# Altium PCB PG4D.PcbDoc (part 1 of 3)
Units mm, origin at the board's own origin, x right, y up, seen from the top; angles counter-clockwise.
Board outline 105.86 x 51.8 mm, 4 copper layers (Top Layer, L2 Flex GND, L3 Flex Signals, Bottom Layer), stack 0.361 mm thick; 218 components, 118 nets, 582 pads, 307 vias.
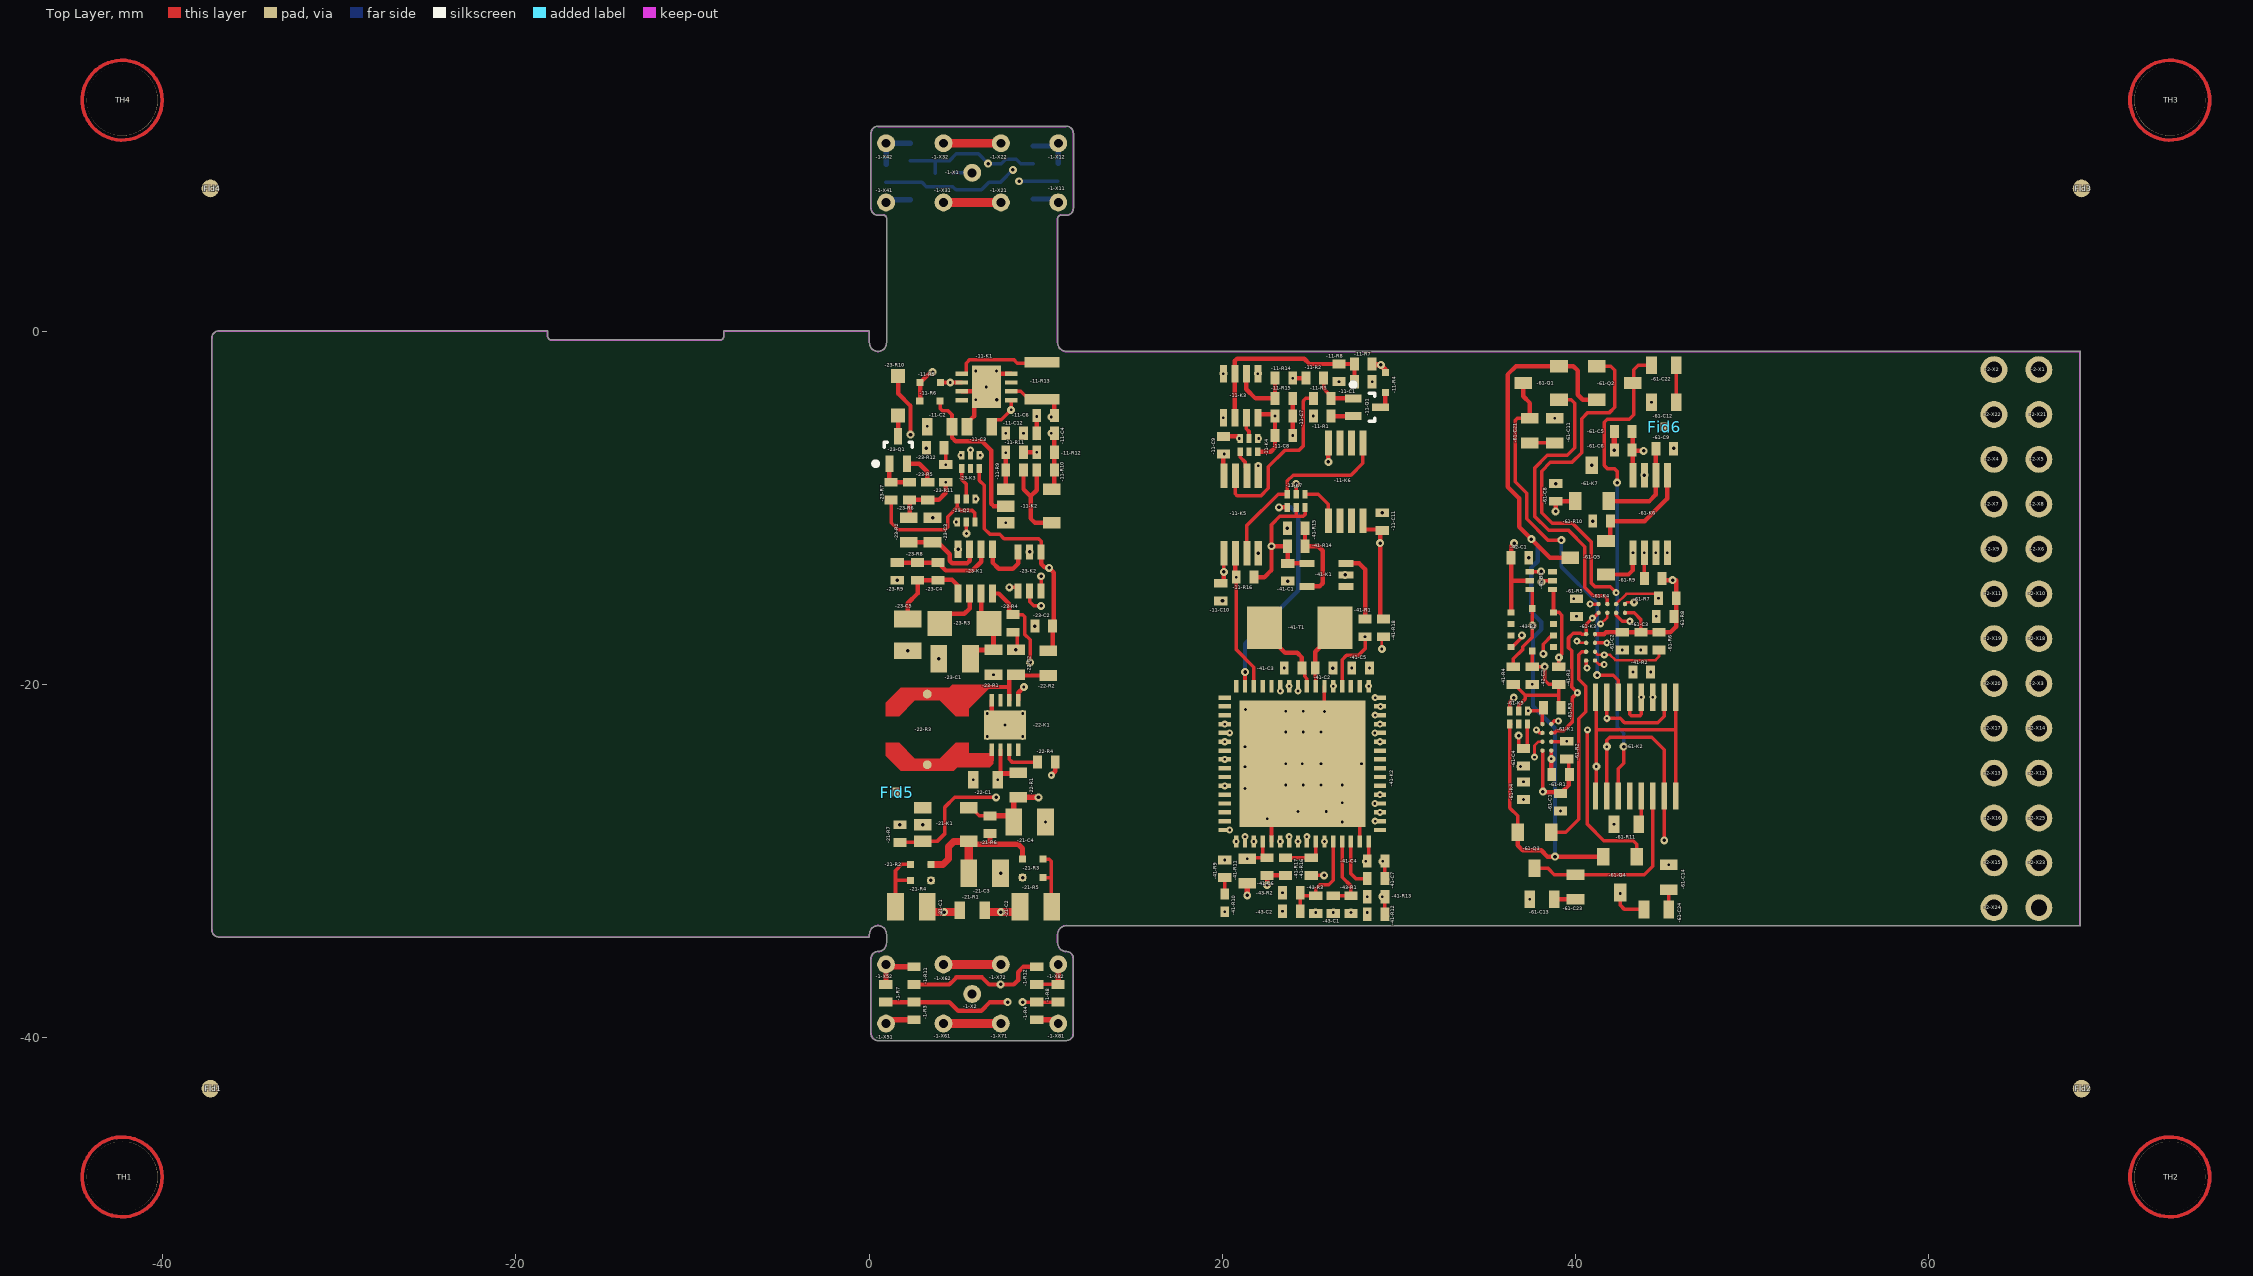
[diagram p0: Top Layer view]
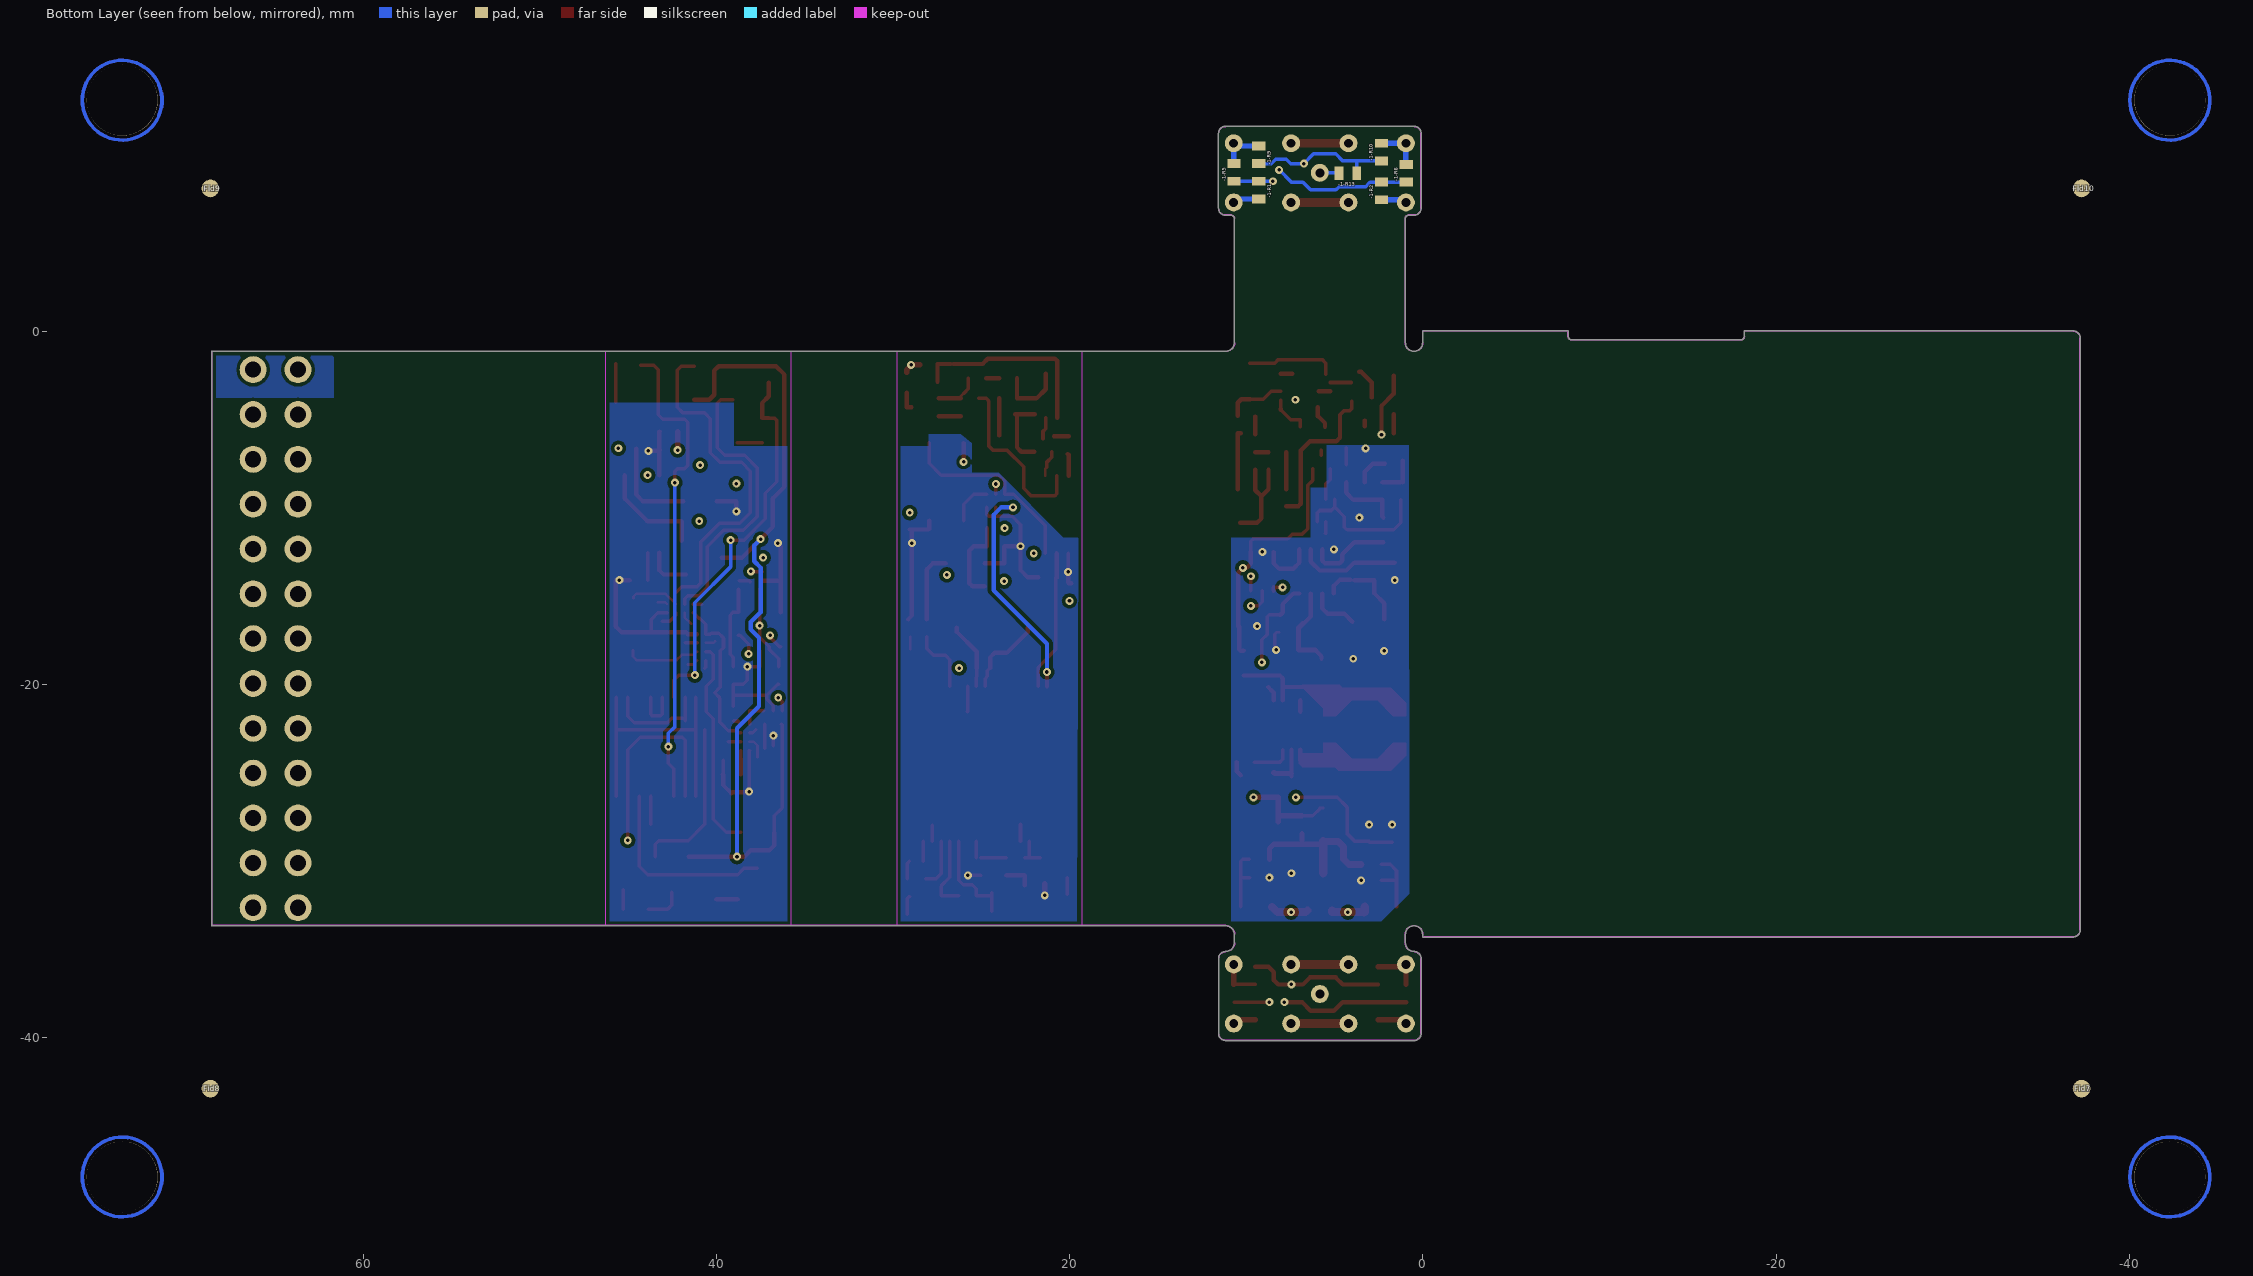
[diagram p1: Bottom Layer view, seen from below]
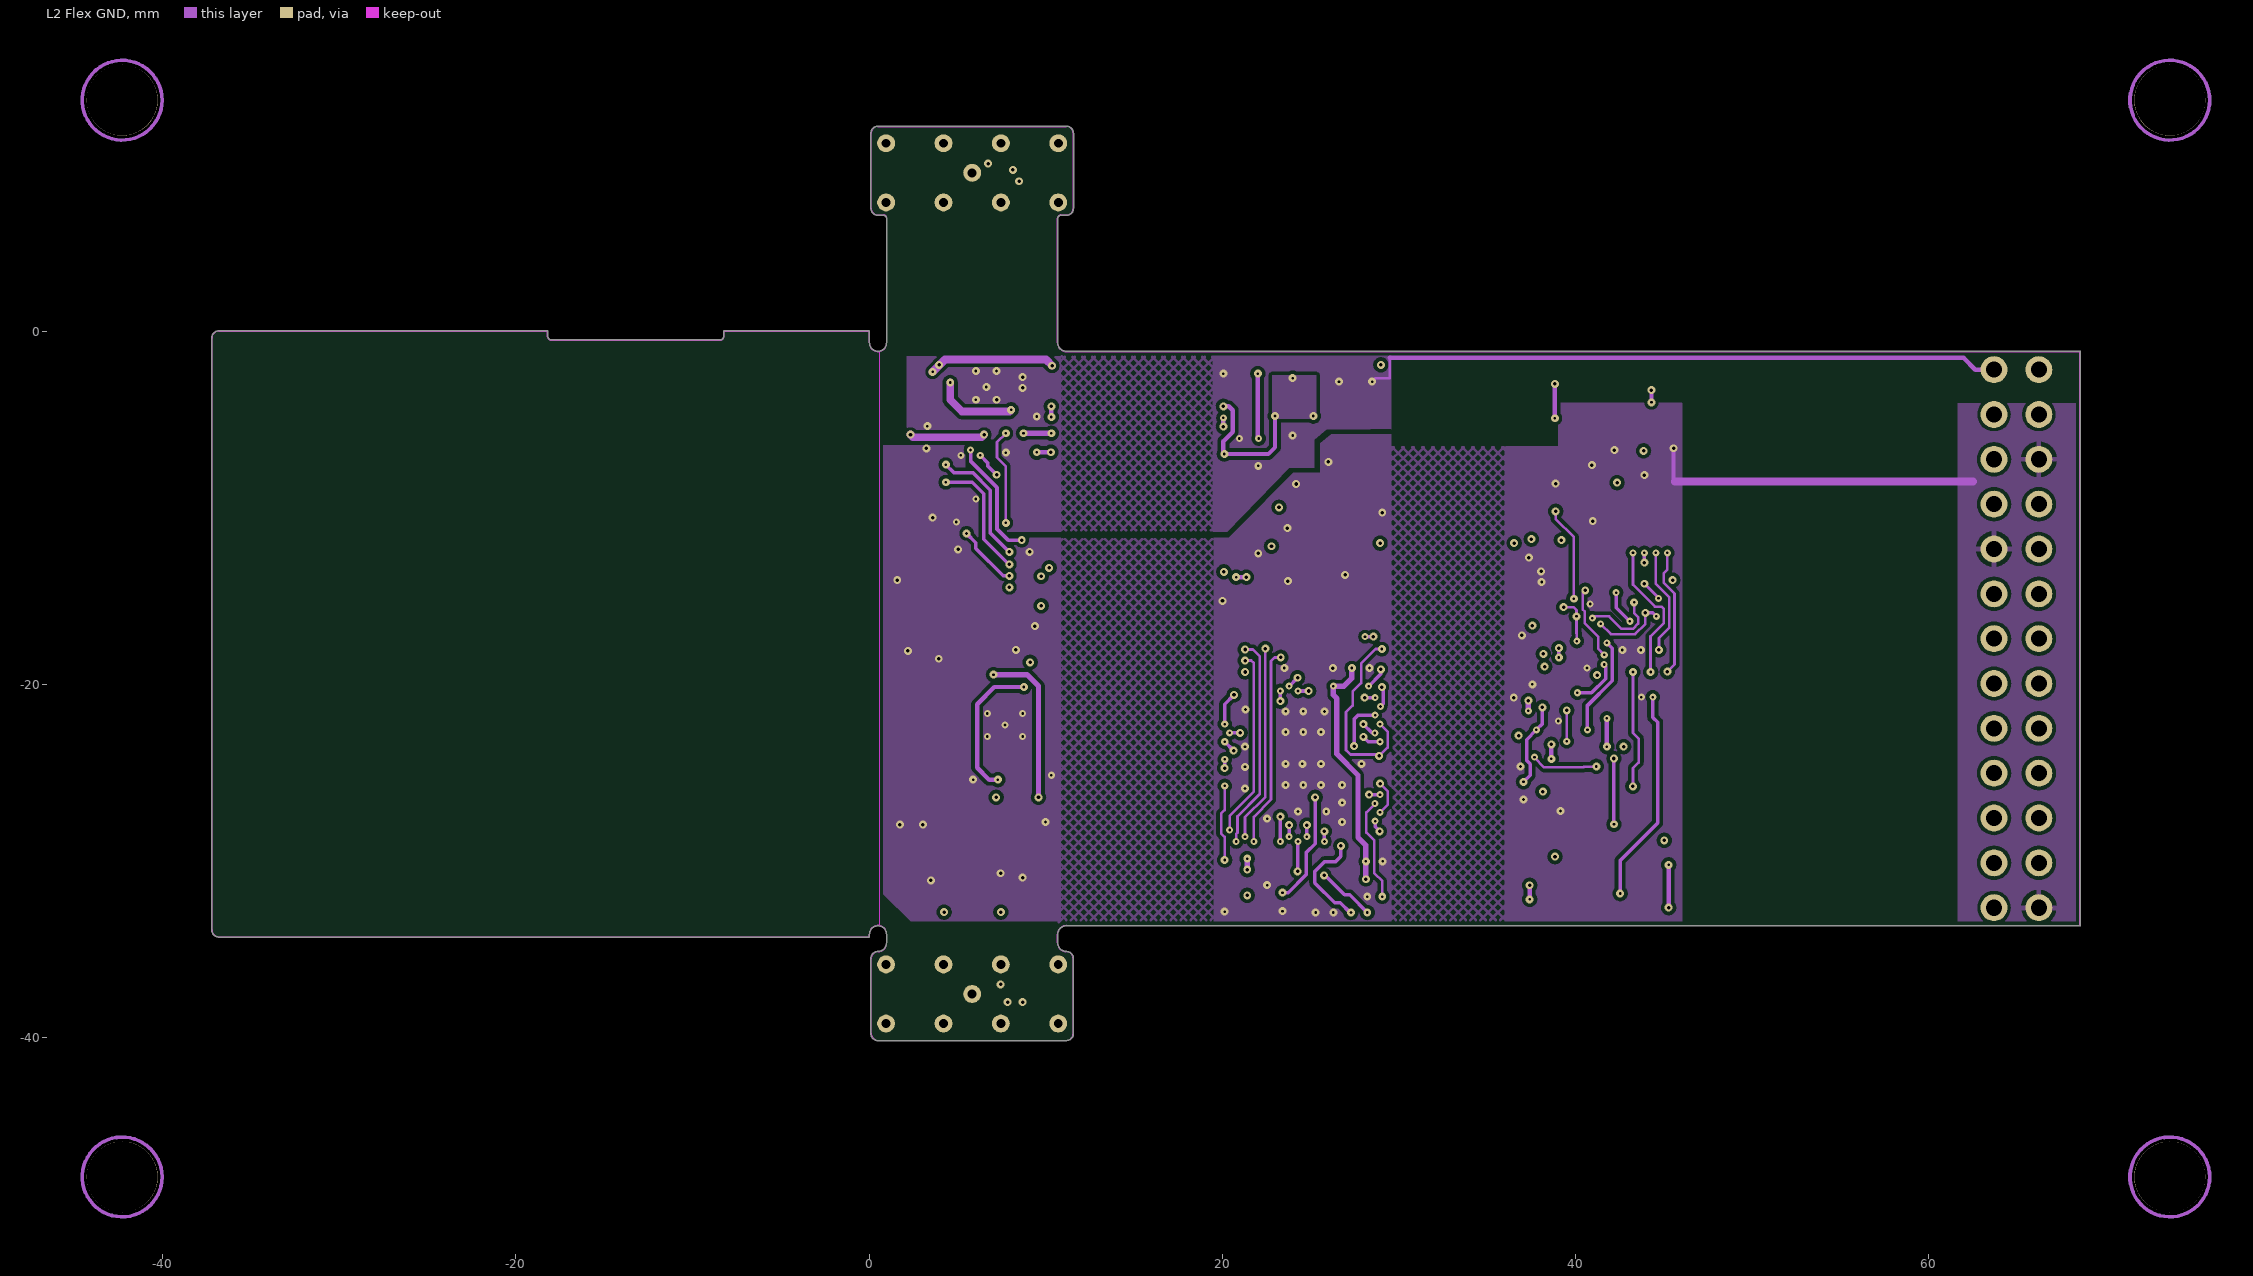
[diagram p2: L2 Flex GND]
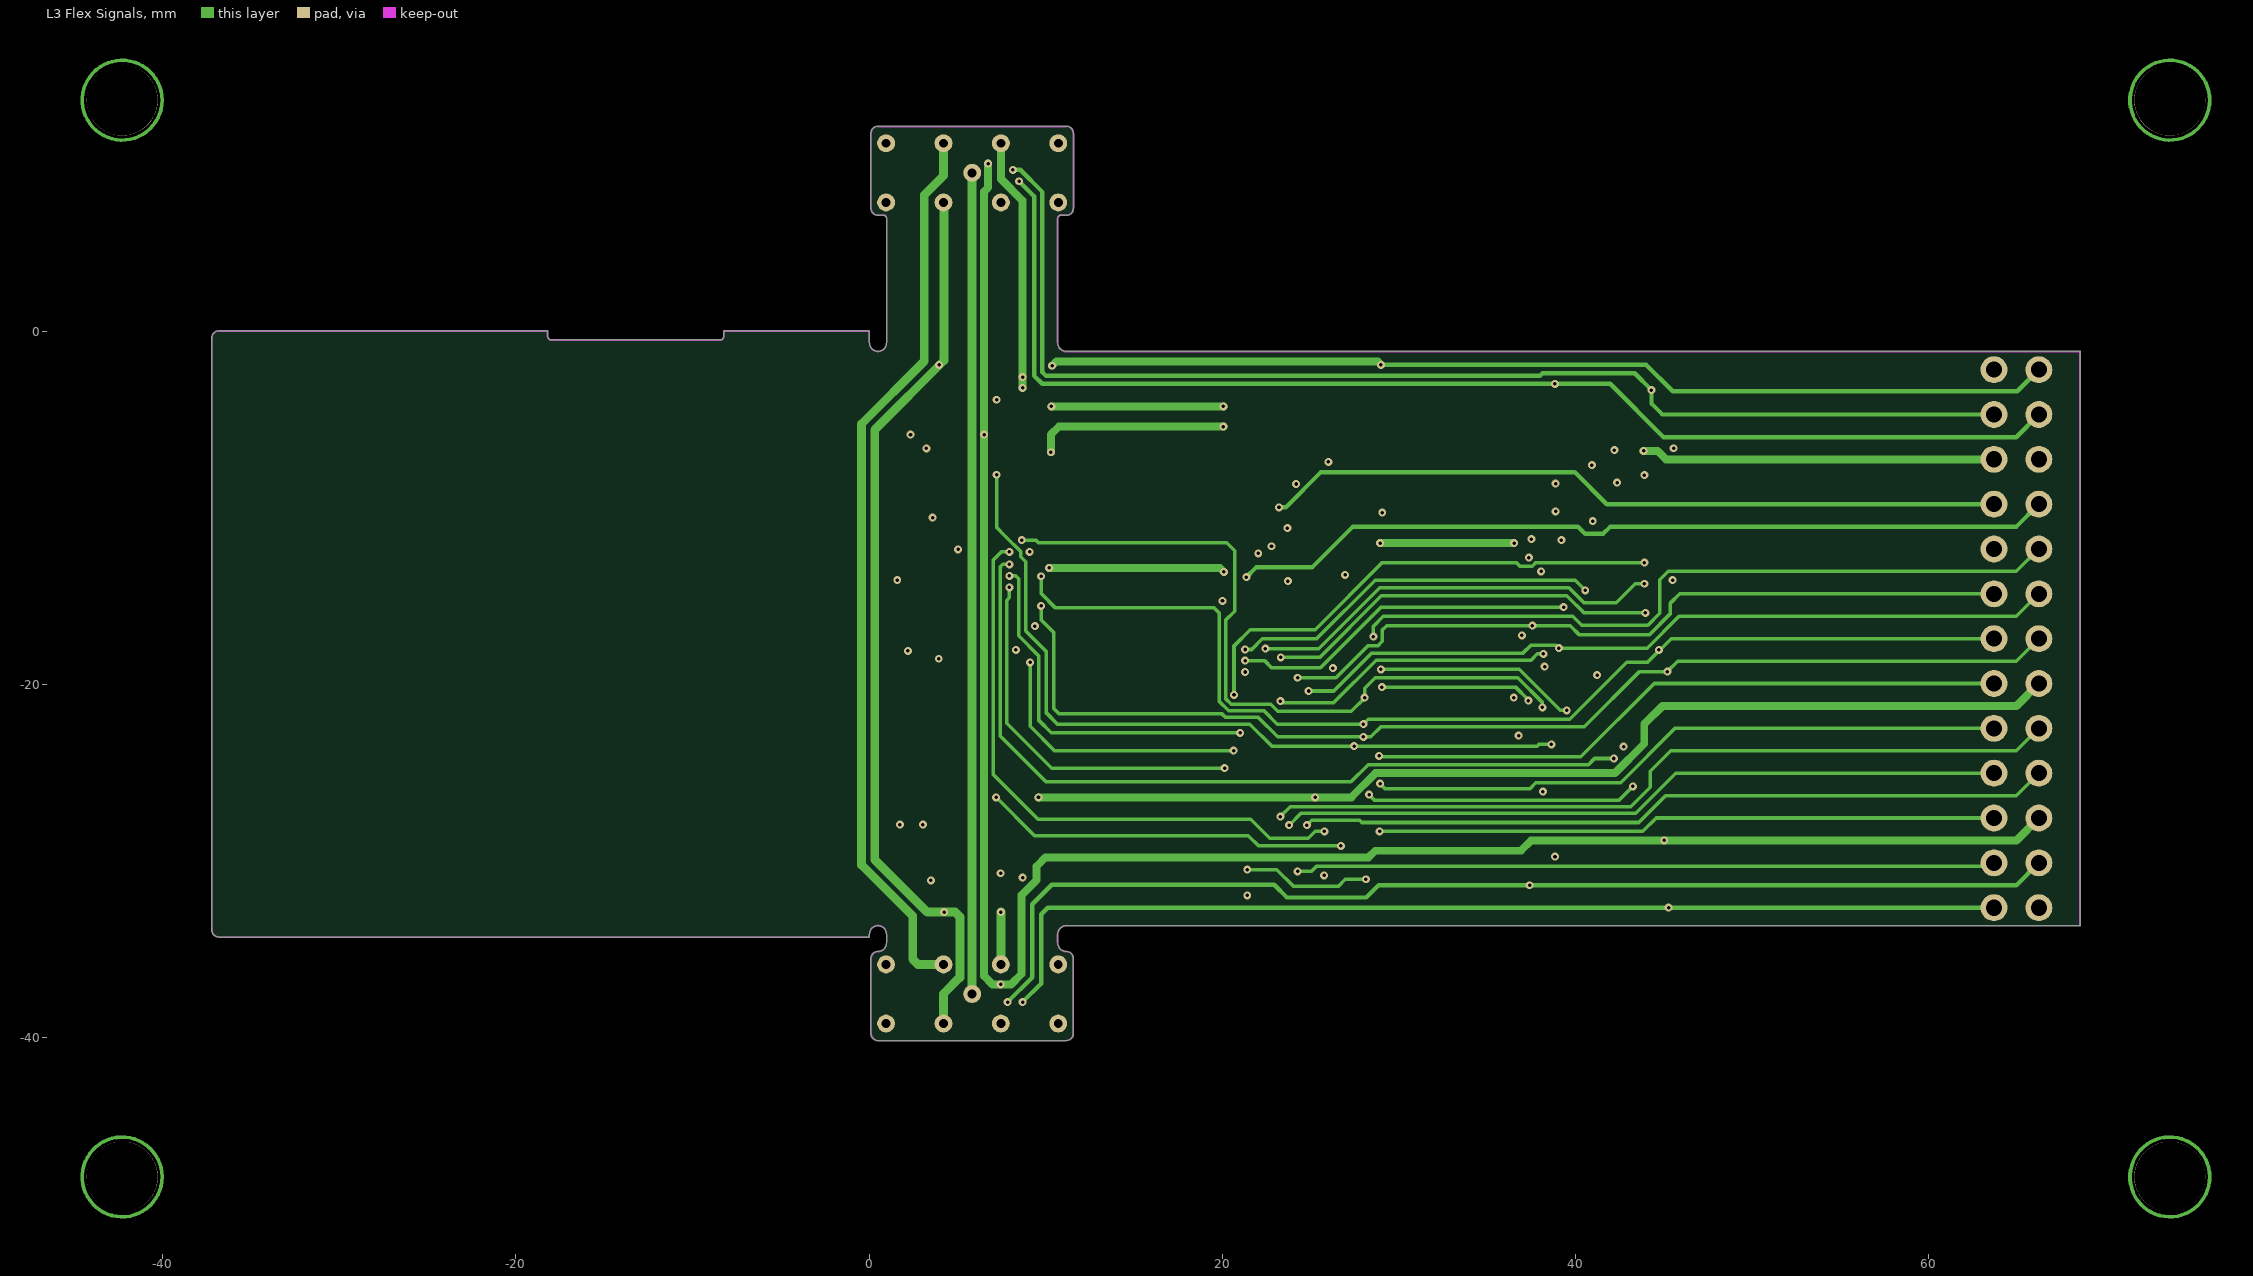
[diagram p3: L3 Flex Signals]
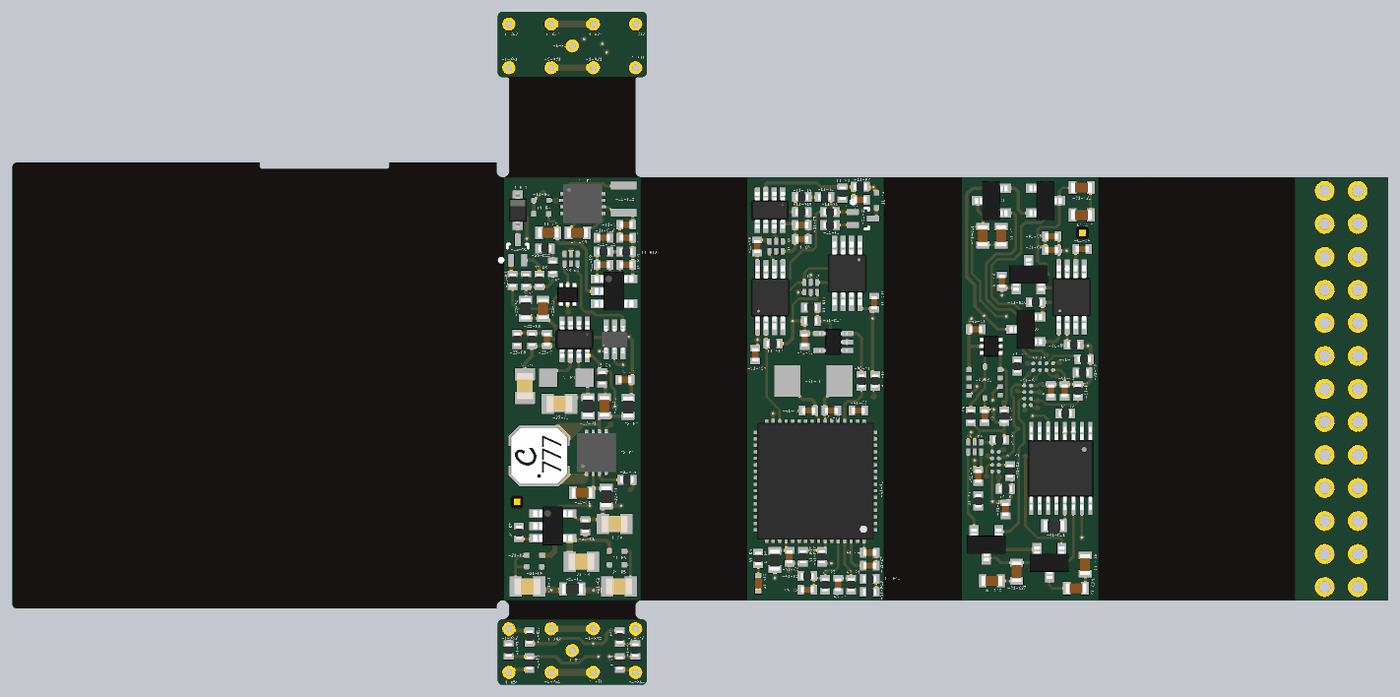
[diagram p6: 3D render of the assembled board from above, using the file's embedded part models]
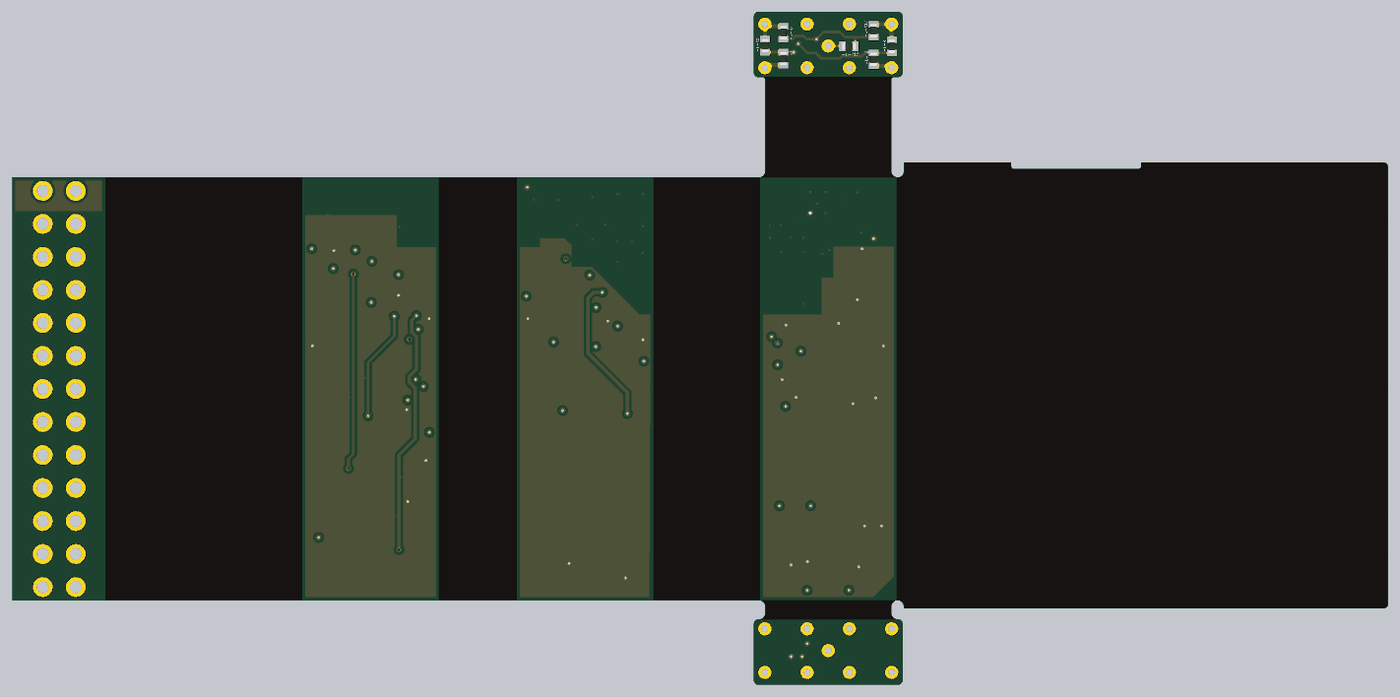
[diagram p7: 3D render of the assembled board from below, using the file's embedded part models]

## Layer stack, top to bottom
Top Solder: solder mask 0.0127, Solder Resist, Dk 3.5
Top Layer: signal copper 0.0533
Dielectric1: prepreg 0.0483, Composite dielectric, Dk 4.48
Dielectric1a: prepreg 0.0483, Composite dielectric, Dk 4.48
L2 Flex GND: signal copper 0.0178
Dielectric2: core 0.0254, AP8515R, Dk 4.8
L3 Flex Signals: signal copper 0.0178
Dielectric3: prepreg 0.0483, Composite dielectric, Dk 4.48
Dielectric3a: prepreg 0.0483, Composite dielectric, Dk 4.48
Bottom Layer: signal copper 0.0533
Bottom Solder: solder mask 0.0127, Solder Resist, Dk 3.5

## Board outline
-36.834,-34.315 0,-34.315 ccw(c0,-34.29) 0.025,-34.29 0.025,-34.163 cw(c0.508,-34.163) 0.991,-34.163 0.991,-34.647 cw(c0.508,-34.647) 0.508,-35.13 ccw(c0.508,-35.536) 0.102,-35.536 0.102,-39.774 ccw(c0.508,-39.774) 0.508,-40.18 11.176,-40.18 ccw(c11.176,-39.774) 11.582,-39.774 ccw(c11.557,-39.774) 11.582,-39.774 11.582,-35.536 ccw(c11.557,-35.536) 11.582,-35.536 cw(c11.176,-35.536) 11.582,-35.536 ccw(c11.176,-35.536) 11.176,-35.13 cw(c11.176,-34.647) 10.693,-34.647 10.693,-34.163 cw(c11.176,-34.163) 11.176,-33.68 68.596,-33.68 ccw(c68.596,-33.655) 68.622,-33.655 68.622,-1.155 ccw(c68.596,-1.155) 68.596,-1.13 11.176,-1.13 cw(c11.176,-0.647) 10.693,-0.656 ccw(c10.67,-0.647) 10.695,-0.647 10.695,6.395 cw(c10.87,6.395) 10.858,6.569 11.179,6.569 ccw(c11.179,6.975) 11.585,6.975 11.585,11.214 ccw(c11.178,11.214) 11.181,11.62 ccw(c11.178,11.214) 11.181,11.62 ccw(c11.176,11.595) 11.18,11.62 ccw(c11.176,11.595) 11.176,11.62 0.508,11.62 ccw(c0.508,11.214) 0.102,11.214 0.102,6.975 ccw(c0.127,6.975) 0.104,6.964 ccw(c0.509,6.975) 0.509,6.569 0.83,6.569 cw(c0.818,6.395) 0.992,6.395 cw(c0.818,6.395) 0.992,6.395 0.991,-0.647 ccw(c1.016,-0.647) 0.991,-0.647 cw(c0.508,-0.647) 0.991,-0.647 cw(c0.508,-0.647) 0.991,-0.647 cw(c0.508,-0.647) 0.025,-0.647 0.025,0 ccw(c0,0) 0,0.025 -8.215,0.025 ccw(c-8.215,0) -8.241,0 -8.241,-0.3 cw(c-8.415,-0.3) -8.415,-0.475 -18.015,-0.475 cw(c-18.015,-0.3) -18.19,-0.3 -18.19,0 ccw(c-18.215,0) -18.215,0.025 -36.834,0.025 ccw(c-36.834,-0.381) -37.241,-0.381 -37.241,-33.909 ccw(c-36.834,-33.909)
board region "Layer Stack Region 1": 0.588,-33.687 0.508,-33.671 0.32,-33.708 0.16,-33.815 0.053,-33.975 0.016,-34.163 0.025,-34.29 0.027,-34.29 0.019,-34.309 0,-34.318 -36.834,-34.315 -36.834,-34.323 -36.993,-34.292 -37.127,-34.202 -37.217,-34.068 -37.249,-33.909 -37.241,-0.381 -37.249,-0.381 -37.217,-0.222 -37.127,-0.088 -36.993,0.002 -36.834,0.033 -18.215,0.025 -18.215,0.027 -18.196,0.019 -18.188,0 -18.19,-0.3 -18.193,-0.3 -18.18,-0.368 -18.141,-0.426 -18.083,-0.464 -18.015,-0.478 -8.415,-0.475 -8.415,-0.478 -8.347,-0.464 -8.289,-0.426 -8.251,-0.368 -8.237,-0.3 -8.241,0 -8.243,0 -8.235,0.019 -8.215,0.027 0,0.025 0,0.027 0.019,0.019 0.027,0 0.025,-0.647 0.016,-0.647 0.053,-0.835 0.16,-0.995 0.32,-1.102 0.508,-1.139 0.594,-1.122
board region "Layer Stack Region 1": 10.851,6.569 10.802,6.559 10.744,6.521 10.705,6.463 10.692,6.395 10.695,-0.647 10.697,-0.647 10.693,-0.656 10.686,-0.656 10.721,-0.835 10.828,-0.995 10.988,-1.102 11.082,-1.12 11.082,-1.13 0.594,-1.122 0.696,-1.102 0.856,-0.995 0.963,-0.835 1,-0.647 0.989,-0.647 1,-0.647 0.989,-0.647 0.992,6.395 0.996,6.395 0.982,6.463 0.944,6.521 0.895,6.553
board region "Layer Stack Region 1": 11.082,-1.13 11.082,-1.12 11.128,-1.13
board region "Layer Stack Region 1": 0.589,-33.687 0.588,-33.687 0.594,-1.122 11.082,-1.13 11.1,-33.686 11.044,-33.697
board region "Layer Stack Region 1": 19.405,-33.681 11.176,-33.68 11.176,-33.671 11.1,-33.686 11.082,-1.13 11.128,-1.13 11.176,-1.139 19.277,-1.138
board region "Layer Stack Region 1": 0.895,6.553 0.886,6.559 0.83,6.571 0.509,6.569 0.509,6.561 0.351,6.593 0.217,6.682 0.127,6.816 0.098,6.964 0.104,6.964 0.1,6.975 0.102,11.214 0.094,11.214 0.125,11.373 0.215,11.507 0.349,11.597 0.508,11.628 11.176,11.62 11.176,11.622 11.181,11.621 11.181,11.628 11.337,11.596 11.471,11.507 11.561,11.372 11.593,11.214 11.585,6.975 11.593,6.975 11.561,6.816 11.472,6.682 11.337,6.593 11.179,6.561 10.858,6.569 10.858,6.571 10.85,6.569
board region "Layer Stack Region 1": 0.594,-35.122 0.696,-35.102 0.856,-34.995 0.963,-34.835 1,-34.647 0.991,-34.163 1,-34.163 0.963,-33.975 0.856,-33.815 0.696,-33.708 0.589,-33.687 11.044,-33.697 10.988,-33.708 10.828,-33.815 10.721,-33.975 10.684,-34.163 10.693,-34.647 10.684,-34.647 10.721,-34.835 10.828,-34.995 10.988,-35.102 11.082,-35.12
board region "Layer Stack Region 1": 11.082,-35.12 11.176,-35.139 11.176,-35.122 11.335,-35.153 11.469,-35.243 11.559,-35.377 11.59,-35.536 11.582,-35.536 11.59,-35.536 11.584,-35.536 11.582,-39.774 11.584,-39.774 11.59,-39.774 11.559,-39.933 11.469,-40.067 11.335,-40.157 11.176,-40.188 0.508,-40.18 0.508,-40.188 0.349,-40.157 0.215,-40.067 0.125,-39.933 0.094,-39.774 0.102,-35.536 0.094,-35.536 0.125,-35.377 0.215,-35.243 0.349,-35.153 0.508,-35.122 0.508,-35.139 0.594,-35.122
board region "Layer Stack Region 1": 29.798,-33.681 19.405,-33.681 19.277,-1.138 29.9,-1.136
board region "Layer Stack Region 1": 35.794,-33.681 29.798,-33.681 29.9,-1.136 35.794,-1.135
board region "Layer Stack Region 1": 46.294,-33.682 35.794,-33.681 35.794,-1.135 46.4,-1.133
board region "Layer Stack Region 1": 61.507,-33.682 46.294,-33.682 46.4,-1.133 61.499,-1.131
board region "Layer Stack Region 1": 61.499,-1.131 68.596,-1.13 68.596,-1.128 68.616,-1.136 68.624,-1.155 68.622,-33.655 68.624,-33.655 68.616,-33.674 68.596,-33.683 61.507,-33.682

## Design rules (kind name [scope] priority, off if disabled: settings)
Clearance FEEDHOLE_20MIL [HasFootprint('FEEDHOLE_20MIL') vs IsKeepout] p1: gap=0.18
Clearance Polygon [InPolygon] p2: gap=0.2
Clearance "Pad to Pad" [IsPad vs IsPad] p3: gap=0.2
Clearance Clearance_keepout [IsKeepout] p4: gap=0.2
Clearance [All] p5: gap=0.152
ComponentClearance [All vs All and Not HasFootprint('HDR_HOLE_RING')] p1: gap=0.25 collisioncheckmode=3 verticalgap=0.25 showdistances=TRUE
HoleToHoleClearance [All] p1: gap=0.2 allowstackedmicrovias=TRUE
MinimumSolderMaskSliver FEEDHOLE_20MIL_Solder [HasFootprint('FEEDHOLE_20MIL') vs IsArc or IsTrack or IsRegion] p1: minsoldermaskwidth=0.05
MinimumSolderMaskSliver [All vs All and NOT HasFootprint('DFN8') AND NOT HasFootprint('uSOP-8L') AND NOT HasFootprint('uPak6') AND NOT HasFootprint('SOT-563') AND NOT HasFootprint('QFN64')] p2: minsoldermaskwidth=0.1
PasteMaskExpansion DNP [InComponentClass('DNP')] p1: expansion=-2
PasteMaskExpansion [All] p2: expansion=0
PolygonConnect IsVia [IsVia] p1: connectstyle=Direct reliefconductorwidth=0.254 reliefentries=4 polygonreliefangle="90 Angle" airgapwidth=0.254
PolygonConnect [All] p2: connectstyle=Relief reliefconductorwidth=0.3 reliefentries=4 polygonreliefangle="90 Angle" airgapwidth=0.25
RoutingVias L1-L4 [All] p1: holewidth=0.2 width=0.45 viastyle="Through Hole" minholewidth=0.15 minwidth=0.4 maxholewidth=0.2 maxwidth=0.45
SilkToSolderMaskClearance SilkscreenOverComponentPads [IsPad] p1: minsilkscreentomaskgap=0.254 clearancetoexposedcopper=TRUE
SolderMaskExpansion [All] p1: expansion=0.05
Width [All] p1: maxlimit=1 minlimit=0.15 preferedwidth=0.25 checkconnectedcopper=TRUE
24 further rules are at their usual default settings.

## Classes and differential pairs
component class DNP: -1-R9 -1-R10 -1-R11 -1-R12 -23-R11 -23-R12 -41-R15

## Components (designator, comment, footprint, x,y, rotation, side; value= is the part's Value field where it differs from the comment)
-1-R1 "R_0_0402" RES_0402 9.3,8 r90 bottom
-1-R2 "R_0_0402" RES_0402 2.35,7.95 r90 bottom
-1-R3 "R_0_0402" RES_0402 2.55,-38.5 r90 top
-1-R4 "R_0_0402" RES_0402 9.5,-38.5 r90 top
-1-R5 "R_0_0402" RES_0402 10.7,9 r270 bottom
-1-R6 "R_0_0402" RES_0402 0.95,8.95 r270 bottom
-1-R7 "R_0_0402" RES_0402 0.95,-37.5 r270 top
-1-R8 "R_0_0402" RES_0402 10.7,-37.5 r270 top
-1-R9 "R_DNP_0402" RES_0402 9.3,10 r270 bottom
-1-R10 "R_DNP_0402" RES_0402 2.35,10.15 r270 bottom
-1-R11 "R_DNP_0402" RES_0402 2.55,-36.5 r270 top
-1-R12 "R_DNP_0402" RES_0402 9.5,-36.5 r90 top
-1-R13 "R_0_0402" RES_0402 4.25,8.95 r180 bottom
-1-X1 "HOLE_20m" FEEDHOLE_20MIL 5.844,8.979 r270 top
-1-X2 "HOLE_20m" FEEDHOLE_20MIL 5.842,-37.539 r270 top
-1-X11 "HOLE_20m" FEEDHOLE_20MIL 10.721,7.302 r270 top
-1-X12 "HOLE_20m" FEEDHOLE_20MIL 10.721,10.655 r270 top
-1-X21 "HOLE_20m" FEEDHOLE_20MIL 7.47,7.302 r270 top
-1-X22 "HOLE_20m" FEEDHOLE_20MIL 7.47,10.655 r270 top
-1-X31 "HOLE_20m" FEEDHOLE_20MIL 4.219,7.302 r270 top
-1-X32 "HOLE_20m" FEEDHOLE_20MIL 4.219,10.655 r270 top
-1-X41 "HOLE_20m" FEEDHOLE_20MIL 0.967,7.302 r270 top
-1-X42 "HOLE_20m" FEEDHOLE_20MIL 0.967,10.655 r270 top
-1-X51 "HOLE_20m" FEEDHOLE_20MIL 0.965,-39.215 r270 top
-1-X52 "HOLE_20m" FEEDHOLE_20MIL 0.965,-35.862 r270 top
-1-X61 "HOLE_20m" FEEDHOLE_20MIL 4.216,-39.215 r270 top
-1-X62 "HOLE_20m" FEEDHOLE_20MIL 4.216,-35.862 r270 top
-1-X71 "HOLE_20m" FEEDHOLE_20MIL 7.468,-39.215 r270 top
-1-X72 "HOLE_20m" FEEDHOLE_20MIL 7.468,-35.862 r270 top
-1-X81 "HOLE_20m" FEEDHOLE_20MIL 10.719,-39.215 r270 top locked
-1-X82 "HOLE_20m" FEEDHOLE_20MIL 10.719,-35.862 r270 top locked
-2-X1 "0.1\" header hole" HDR_HOLE_RING 66.27,-2.171 r270 top
-2-X2 "0.1\" header hole" HDR_HOLE_RING 63.73,-2.171 r270 top
-2-X3 "0.1\" header hole" HDR_HOLE_RING 66.27,-19.951 r270 top
-2-X4 "0.1\" header hole" HDR_HOLE_RING 63.73,-7.251 r270 top
-2-X5 "0.1\" header hole" HDR_HOLE_RING 66.27,-7.251 r270 top
-2-X6 "0.1\" header hole" HDR_HOLE_RING 66.27,-12.331 r270 top
-2-X7 "0.1\" header hole" HDR_HOLE_RING 63.73,-9.791 r270 top
-2-X8 "0.1\" header hole" HDR_HOLE_RING 66.27,-9.791 r270 top
-2-X9 "0.1\" header hole" HDR_HOLE_RING 63.73,-12.331 r270 top
-2-X10 "0.1\" header hole" HDR_HOLE_RING 66.27,-14.871 r270 top
-2-X11 "0.1\" header hole" HDR_HOLE_RING 63.73,-14.871 r270 top
-2-X12 "0.1\" header hole" HDR_HOLE_RING 66.27,-25.031 r270 top
-2-X13 "0.1\" header hole" HDR_HOLE_RING 63.73,-25.031 r270 top
-2-X14 "0.1\" header hole" HDR_HOLE_RING 66.27,-22.491 r270 top
-2-X15 "0.1\" header hole" HDR_HOLE_RING 63.73,-30.111 r270 top
-2-X16 "0.1\" header hole" HDR_HOLE_RING 63.73,-27.571 r270 top
-2-X17 "0.1\" header hole" HDR_HOLE_RING 63.73,-22.491 r270 top
-2-X18 "0.1\" header hole" HDR_HOLE_RING 66.27,-17.411 r270 top
-2-X19 "0.1\" header hole" HDR_HOLE_RING 63.73,-17.411 r270 top
-2-X20 "0.1\" header hole" HDR_HOLE_RING 63.73,-19.951 r270 top
-2-X21 "0.1\" header hole" HDR_HOLE_RING 66.27,-4.711 r270 top
-2-X22 "0.1\" header hole" HDR_HOLE_RING 63.73,-4.711 r270 top
-2-X23 "0.1\" header hole" HDR_HOLE_RING 66.27,-30.111 r270 top
-2-X24 "0.1\" header hole" HDR_HOLE_RING 63.73,-32.651 r270 top
-2-X25 "0.1\" header hole" HDR_HOLE_RING 66.27,-27.571 r270 top
-11-C1 "C_68p_C0G_50_0402_5%" CAP_0402 28,-2.85 r0 top
-11-C2 "C_1u_X5R_50_0603_10%" CAP_0603 4,-5.4 r180 top
-11-C3 "C_1u_X5R_50_0603_10%" CAP_0603 6.25,-5.4 r180 top
-11-C4 "C_4u7_X5R_6V3_0402_20%" CAP_0402 10,-5.775 r180 top
-11-C6 "C_4u7_X5R_6V3_0402_20%" CAP_0402 10,-4.775 r180 top
-11-C7 "C_100n_X7R_16_0402_10%" CAP_0402 23.5,-4.8 r0 top
-11-C8 "C_100n_X7R_16_0402_10%" CAP_0402 23.5,-5.9 r0 top
-11-C9 "C_100n_X7R_16_0402_10%" CAP_0402 20.075,-6.45 r90 top
-11-C10 "C_100n_X7R_16_0402_10%" CAP_0402 19.925,-14.775 r270 top
-11-C11 "C_100n_X7R_16_0402_10%" CAP_0402 29.075,-10.775 r90 top
-11-C12 "C_10n_X7R_50_0402_20%" CAP_0402 8.25,-5.775 r0 top
-11-K1 "BUCK 4.5-45V DFN8" DFN8 6.65,-3.15 r0 top
-11-K2 "LDO -1.2-20V -200mA" SOT23-5 9.05,-9.9 r0 top
-11-K3 "CMP 2.7-5.5V 40ns SOT23-8" SOT23-8 21.05,-3.65 r270 top
-11-K4 "XOR 1.65-5.5V uPAK6" uPak6 21.525,-6.45 r270 top
-11-K5 "ISO DIG 3-5.5V uSOP8" uSOP-8L 21.075,-10.375 r90 top locked
-11-K6 "Silicon delay 3-3.6V uSOP8" uSOP-8L 27,-8.525 r270 top
-11-K7 "FLIPFLOP 1.65-5.5V uPAk6" uPak6 24.2,-9.6 r270 top
-11-Q1 "Q_-50_-100m_SOT523" SOT523 28.2,-4.3 r0 top
-11-R1 "R_1k_0402" RES_0402 25.675,-4.8 r0 top
-11-R2 "R_5k1_0402" RES_0402 25.25,-2.65 r0 top
-11-R3 "R_5k1_0402" RES_0402 25.675,-3.8 r180 top
-11-R4 "D_30_100m" SSSMini2-F4-B 29.25,-2.9 r270 top
-11-R5 "D_30_100m" SSSMini2-F4-B 3.475,-2.9 r180 top
-11-R6 "D_30_100m" SSSMini2-F4-B 3.45,-3.95 r0 top
-11-R7 "R_49k9_0402" RES_0402 28,-1.85 r180 top
-11-R8 "R_1k_0402" RES_0402 26.625,-2.35 r270 top
-11-R9 "R_49k9_0402" CAP_0402 8.25,-7.85 r0 top
-11-R10 "R_84k5_0402" CAP_0402 10,-7.85 r0 top
-11-R11 "R_1k_0402" RES_0402 8.25,-6.85 r0 top
-11-R12 "R_49k9_0402" RES_0402 10,-6.85 r0 top
-11-R13 "L_470u_35m_10%" IND_1007 9.8,-2.8 r270 top
-11-R14 "R_49k9_0402" RES_0402 23.5,-2.65 r180 top
-11-R15 "R_1k_0402" RES_0402 23.5,-3.8 r0 top
-11-R16 "R_49k9_0402" RES_0402 21.3,-13.925 r180 top
-21-C1 "C_100n_X7R_100_0805_10%" CAP_0805 2.4,-32.6 r180 top
-21-C2 "C_100n_X7R_100_0805_10%" CAP_0805 9.45,-32.6 r0 top
-21-C3 "C_47u_X5R_10_0805_20%" CAP_0805 6.55,-30.7 r0 top
-21-C4 "C_47u_X5R_10_0805_20%" CAP_0805 9.1,-27.8 r0 top
-21-K1 "CUR 2.5-20V SOT23-5" SOT23-5 4.35,-27.95 r0 top
-21-R1 "MOV 12V 0603" RES_0603 5.85,-32.8 r0 top
-21-R2 "D_30_100m" SSSMini2-F4-B 2.925,-30.2 r180 top
-21-R3 "D_30_100m" SSSMini2-F4-B 9.275,-29.9 r0 top
-21-R4 "D_30_100m" SSSMini2-F4-B 2.925,-31.1 r0 top
-21-R5 "D_30_100m" SSSMini2-F4-B 9.275,-30.95 r180 top
-21-R6 "R_100m_0402" RES_0402 6.85,-27.95 r90 top
-21-R7 "R_49k9_0402" RES_0402 1.75,-28.45 r90 top
-22-C1 "C_1u_X5R_50_0603_10%" CAP_0603 6.6,-25.4 r180 top
-22-C2 "C_10u_X5R_6V3_0603_20%" CAP_0603 8.325,-18.75 r90 top
-22-K1 "BUCK 4.5-45V DFN8" DFN8 7.7,-22.3 r90 top locked
-22-R1 "R_0_0603" RES_0603 8.45,-25.7 r90 top
-22-R2 "R_0_0603" RES_0603 10.15,-18.8 r90 top
-22-R3 "L_100u_270m_20%" IND-LPS4414 3.3,-22.55 r90 top
-22-R4 "R_470k_0402" RES_0402 10.05,-24.4 r0 top
-23-C1 "C_47u_X5R_10_0805_20%" CAP_0805 4.85,-18.55 r180 top
-23-C2 "C_100n_X7R_16_0402_10%" CAP_0402 9.9,-16.7 r180 top
-23-C3 "C_1u_X5R_50_0603_10%" CAP_0603 3.6,-11.25 r90 top
-23-C4 "C_10p_C0G_50_0402_5%" CAP_0402 3.9,-13.6 r90 top
-23-C5 "C_330n_X7R_50_0805_10%" CAP_0805 2.2,-17.2 r270 top
-23-K1 "BOOST 2.3-10V TSOT23-8" SOT23-8 6.025,-13.6 r270 top
-23-K2 "DAC REF 2V5" SC70-6 9.1,-13.6 r90 top
-23-K3 "NOR 1.65-5.5V uPak6" uPak6 5.75,-7.4 r270 top
-23-Q1 "Q_-50_-100m_SOT523" SOT523 1.65,-6.725 r90 top
-23-Q2 "M_60_500m_SOT563" SOT-563 5.5,-10.15 r270 top
-23-R1 "R_0_0603" RES_0603 7.05,-18.75 r90 top
-23-R2 "R_0_0603" RES_0603 2.25,-11.25 r90 top
-23-R3 "L_33u_120m_2520_10%" IND_1008 5.4,-16.55 r180 top
-23-R4 "R_15k_0402" RES_0402 8.15,-16.55 r270 top
-23-R5 "R_10_0402" RES_0402 3.325,-9.05 r90 top
-23-R6 "R_20k_0402" RES_0402 2.3,-9.05 r90 top
-23-R7 "R_150k_0402" RES_0402 1.25,-9.05 r270 top
-23-R8 "R_953k_0402" RES_0402 2.75,-13.6 r90 top
-23-R9 "R_36k_0402" RES_0402 1.6,-13.6 r270 top
-23-R10 "D_100_150m_SOD323" SOD323 1.65,-3.65 r270 top
-23-R11 "R_DNP_0402" RES_0402 4.35,-8.05 r90 top
-23-R12 "R_DNP_0402" RES_0402 3.75,-6.6 r180 top
-41-C1 "C_100n_X7R_16_0402_10%" CAP_0402 23.725,-13.65 r270 top
-41-C2 "C_8p_C0G_50_0402" CAP_0402 25.775,-19.075 r0 top
-41-C3 "C_8p_C0G_50_0402" CAP_0402 24.025,-19.075 r180 top
-41-C4 "C_100n_X7R_16_0402_10%" CAP_0402 28.725,-30 r0 top
-41-C5 "C_100n_X7R_16_0402_10%" CAP_0402 27.85,-19.075 r0 top
-41-C6 "C_100n_X7R_16_0402_10%" CAP_0402 22.55,-30.325 r270 top
-41-C7 "C_100n_X7R_16_0402_10%" CAP_0402 28.725,-31 r0 top
-41-K1 "RESET 1.3-6.0V SC70-5" SC70-5 25.925,-13.8 r180 top
-41-K2 "uC 2.7-5.5V 8bit QFN64" QFN64 24.55,-24.5 r180 top locked
-41-R1 "R_10k_0402" RES_0402 28.1,-16.8 r270 top
-41-R2 "R_10k_0402" RES_0402 43.775,-19.3 r180 top
-41-R3 "R_10k_0402" RES_0402 39.075,-19.5 r90 top
-41-R4 "R_10k_0402" RES_0402 36.5,-19.5 r90 top
-41-R9 "R_10k_0402" RES_0402 20.15,-30.45 r270 top
-41-R10 "LED Red 0402" LED_0402_RED 20.15,-32.375 r90 top
-41-R11 "R_0_0603" RES_0603 21.425,-30.575 r90 top
-41-R12 "R_15k_0402" RES_0402 28.725,-33.025 r0 top
-41-R13 "R_100k_0402" RES_0402 28.725,-32.025 r180 top
-41-R14 "R_100k_0402" RES_0402 24.2,-12.175 r0 top
-41-R15 "R_DNP_0402" RES_0402 24.2,-11.15 r180 top
-41-R16 "R_100k_0402" RES_0402 25.05,-30.325 r90 top
-41-R17 "R_100k_0402" RES_0402 23.6,-30.325 r270 top
-41-R18 "R_100k_0402" RES_0402 29.15,-16.8 r270 top
-41-T1 "Crystal 8MHz SMT" NX5032GA 24.4,-16.8 r0 top
-42-B1 "TEMP 1.4-3.6V 10uA 12bit I2C SOT563" SOT-563 38.075,-14.125 r180 top
-42-C1 "C_100n_X7R_16_0402_10%" CAP_0402 36.875,-12.825 r0 top
-42-C2 "C_100n_X7R_16_0402_10%" CAP_0402 37.575,-19.5 r270 top
-43-B2 "ACC 3V3 30uA I2C LGA10" LGA10 37.575,-16.9 r0 top
-43-C1 "C_100n_X7R_16_0402_10%" CAP_0402 26.3,-32.475 r270 top
-43-C2 "C_1n_C0G_50_0402_5%" CAP_0402 23.925,-32.85 r180 top
-43-R1 "R_1k6_0402" RES_0402 27.3,-32.475 r90 top
-43-R2 "R_150k_0402" RES_0402 23.925,-31.8 r0 top
-43-R3 "R_49k9_0402" RES_0402 25.3,-32.475 r270 top
-61-C1 "C_100n_X7R_16_0402_10%" CAP_0402 39.175,-26.675 r270 top
-61-C2 "C_100n_X7R_16_0402_10%" CAP_0402 42.675,-17.55 r270 top
-61-C3 "C_100n_X7R_16_0402_10%" CAP_0402 43.725,-17.55 r270 top
-61-C4 "C_100n_X7R_16_0402_10%" CAP_0402 37.075,-24.125 r270 top
-61-C5 "C_4u7_X5R_6V3_0402_20%" CAP_0402 42.725,-5.675 r180 top
-61-C6 "C_100n_X7R_16_0402_10%" CAP_0402 42.725,-6.725 r180 top
-61-C8 "C_4u7_X5R_6V3_0402_20%" CAP_0402 38.9,-9.125 r90 top
-61-C9 "C_4u7_X5R_6V3_0402_20%" CAP_0402 45.075,-6.65 r0 top
-61-C11 "C_1u_X5R_50_0603_10%" CAP_0603 38.85,-5.625 r270 top
-61-C12 "C_1u_X5R_50_0603_10%" CAP_0603 45.025,-4.025 r0 top
-61-C13 "C_1u_X5R_50_0603_10%" CAP_0603 38.125,-32.175 r0 top
-61-C14 "C_1u_X5R_50_0603_10%" CAP_0603 45.3,-30.925 r270 top
-61-C21 "C_1u_X5R_50_0603_10%" CAP_0603 37.425,-5.625 r90 top
-61-C22 "C_1u_X5R_50_0603_10%" CAP_0603 45.025,-1.925 r180 top
-61-C23 "C_1u_X5R_50_0603_10%" CAP_0603 40.025,-31.475 r90 top
-61-C24 "C_1u_X5R_50_0603_10%" CAP_0603 44.6,-32.75 r180 top
-61-K1 "OR 1.65-5.5V uBGA8" DSBGA-8-YZP 38.4,-23 r180 top
-61-K2 "ANA SW 36V TSSOP16" TSSOP16 43.425,-23.525 r270 top locked
-61-K3 "NOR 1.65-5.5V uBGA8" DSBGA-8-YZP 40.875,-17.9 r0 top
-61-K4 "NOR 1.65-5.5V uBGA8" DSBGA-8-YZP 42.075,-15.7 r270 top
-61-K5 "BUF 1.65-5.5V uPak6" uPak6 36.8,-21.875 r270 top
-61-K6 "DAC 10bit uSOP8" uSOP-8L 44.25,-10.35 r90 top
-61-K7 "REF 1.25V 3.9uA SC70-3" SOT23-3 40.95,-8.6 r0 top
-61-Q1 "M_50_300m_SOT23" SOT23-3 38.075,-2.925 r90 top
-61-Q2 "M_50_300m_SOT23" SOT23-3 42.25,-2.925 r270 top
-61-Q3 "M_50_300m_SOT23" SOT23-3 37.7,-29.4 r180 top
-61-Q4 "M_50_300m_SOT23" SOT23-3 42.55,-30.775 r180 top
-61-Q5 "M_50_300m_SOT23" SOT23-3 40.735,-12.825 r90 top
-61-R1 "R_100k_0402" RES_0402 39.175,-25.1 r180 top
-61-R2 "R_100k_0402" RES_0402 39.525,-23.725 r90 top
-61-R3 "R_100k_0402" RES_0402 38.7,-21.325 r180 top
-61-R4 "R_100k_0402" RES_0402 37.075,-26.025 r270 top
-61-R5 "R_100k_0402" RES_0402 40.075,-15.65 r270 top
-61-R6 "R_100k_0402" RES_0402 44.75,-17.55 r270 top
-61-R7 "R_100k_0402" RES_0402 45.225,-15.125 r180 top
-61-R8 "R_100k_0402" RES_0402 45.1,-16.15 r180 top
-61-R9 "R_100k_0402" RES_0402 44.425,-14 r180 top
-61-R10 "R_56_0402_0%1" RES_0402 41.5,-10.75 r180 top
-61-R11 "R_0_0603" RES_0603 42.9,-27.925 r0 top
Fid1 "Comment" FID -37.31,-42.905 r0 top
Fid2 "Comment" FID 68.69,-42.905 r0 top
Fid3 "Comment" FID 68.69,8.095 r0 top
Fid4 "Comment" FID -37.31,8.095 r0 top
Fid5 "Comment" Fid05 1.59,-26.105 r0 top
Fid6 "Comment" Fid05 45.09,-5.405 r0 top
Fid7 "Comment" FID -37.31,-42.905 r180 bottom
Fid8 "Comment" FID 68.69,-42.905 r180 bottom
Fid9 "Comment" FID 68.69,8.095 r180 bottom
Fid10 "Comment" FID -37.31,8.095 r180 bottom
TH1 "Comment" Tooling-Hole -42.31,-47.905 r0 top
TH2 "Comment" Tooling-Hole 73.69,-47.905 r0 top
TH3 "Comment" Tooling-Hole 73.69,13.095 r0 top
TH4 "Comment" Tooling-Hole -42.31,13.095 r0 top

## Footprints (in the part's own frame and the unit in brackets; to place one, negate y for a bottom-side part, rotate by r counter-clockwise, add the part's x,y. Pads: shape width x height; smd on the part's side, far side on the other; paste and mask are expansions set on the pad)
CAP_0402 [mm] "0402 case"
  rect 0.5x0.75 smd: 1(-0.5,0) 2(0.5,0)
  body extent -0.5,-0.25 0.5,0.25, height 0.5
CAP_0603 [mm] "0603 case"
  rect 0.6x1 smd: 1(-0.7,0) 2(0.7,0)
  body extent -0.8,-0.4 0.8,0.4, height 0.6
CAP_0805 [mm] "0805 case"
  rect 0.95x1.55 smd: 1(-0.9,0) 2(0.9,0)
  body extent -1,-0.62 1,0.63, height 0.6
DFN8 [mm] "8-Lead Plastic DFN 3.00 x 3.00"
  rect 0.7x0.25 smd: 1(-1.4,0.75) 2(-1.4,0.25) 3(-1.4,-0.25) 4(-1.4,-0.75) 5(1.4,-0.75) 6(1.4,-0.25) 7(1.4,0.25) 8(1.4,0.75)
  rect 1.65x2.4 smd paste-0.35: 9(0,0)
  body extent -1.51,-1.5 1.51,1.5, height 0.8
DSBGA-8-YZP [mm] "BGA 8 ball 0.5mm"
  round 0.25 smd paste+0.025 mask+0.05: 1(-0.25,0.75) 2(-0.25,0.25) 3(-0.25,-0.25) 4(-0.25,-0.75) 5(0.25,-0.75) 6(0.25,-0.25) 7(0.25,0.25) 8(0.25,0.75)
  body extent -0.45,-0.95 0.45,0.95, height 0.5
FEEDHOLE_20MIL [mil] "Feedthrough hole 20mil"
  round 40 hole 20: 1(0,0)
FID [mm] "Fiducial Pad 1.0 mm"
  round 1 smd paste-1 mask+0.4: 1.00mm(0,0)
  round 1 on Mech2 paste+0 mask+0: tp(0,0)
  body extent -0.5,-0.5 0.5,0.5, height 0.04
Fid05 [mm] "Fiducial 0.5 mm x 0.5 mm"
  rect 0.5x0.5 on Mech2 paste+0 mask+0: Fid(0,0)
  rect 0.5x0.5 smd paste-1 mask+0.25: Fid(0,0)
  body extent -0.25,-0.25 0.25,0.25, height 0.04
HDR_HOLE_RING [mil] "Single 0.1\" header hole with overlay"
  round 60 hole 36: 1(0,0)
IND-LPS4414 [mm] "2-Leads SMD Inductor"
  round 0.5 smd mask-1: 1(-2,0) 2(2,0)
  Top Layer region: 2.35,-1.5 2.35,1.5 1.5,2.35 0.75,2.35 0.75,1.6 1.65,0.7 1.65,-0.7 0.75,-1.6 0.75,-2.35 1.5,-2.35
  Top Layer region: -2.35,1.5 -2.35,-1.5 -1.5,-2.35 -0.75,-2.35 -0.75,-1.6 -1.65,-0.7 -1.65,0.7 -0.75,1.6 -0.75,2.35 -1.5,2.35
  body extent -2.35,-2.35 2.35,2.35, height 1.4
IND_1007 [mm] "2-Leads Inductor 1007 (2518)"
  rect 0.6x2 smd: 1(-1.05,0) 2(1.05,0)
  body extent -1.25,-0.9 1.25,0.9, height 2
IND_1008 [mm] "2-Leads Inductor 1008 (2520)"
  rect 1.4x1.4 smd: 1(-1.4,0) 2(1.4,0)
  body extent -1.25,-1 1.25,1, height 1.8
LED_0402_RED [mm] "2-Leads SMD LED 1.00 x 0.50 mm"
  rect 0.6x0.5 smd: 1(-0.5,0) 2(0.5,0)
  body extent -0.5,-0.25 0.51,0.25, height 0.45
LGA10 [mm] "10-Leads LGA 3 x 3 x 0.9"
  rect 0.4x0.35 smd: 1(-1.2,0.975) 2(-1.2,0.325) 3(-1.2,-0.325) 4(-1.2,-0.975) 6(1.2,-0.975) 7(1.2,-0.325) 8(1.2,0.325) 9(1.2,0.975)
  rect 0.35x0.4 smd: 5(0,-1.2) 10(0,1.2)
  body extent -1.5,-1.5 1.5,1.5, height 0.9
NX5032GA [mm] "2-Leads SMD Crystal"
  rect 2x2.4 smd: 1(-2,0) 2(2,0)
  body extent -2.6,-1.7 2.6,1.7, height 1.5
QFN64 [mm] "64-Leads QFN 9.00 x 9.00 mm"
  rect 0.7x0.25 smd: 1(-4.4,3.75) 2(-4.4,3.25) 3(-4.4,2.75) 4(-4.4,2.25) 5(-4.4,1.75) 6(-4.4,1.25) 7(-4.4,0.75) 8(-4.4,0.25) 9(-4.4,-0.25) 10(-4.4,-0.75) 11(-4.4,-1.25) 12(-4.4,-1.75) 13(-4.4,-2.25) 14(-4.4,-2.75) 15(-4.4,-3.25) 16(-4.4,-3.75) 33(4.4,-3.75) 34(4.4,-3.25) 35(4.4,-2.75) 36(4.4,-2.25) 37(4.4,-1.75) 38(4.4,-1.25) 39(4.4,-0.75) 40(4.4,-0.25) 41(4.4,0.25) 42(4.4,0.75) 43(4.4,1.25) 44(4.4,1.75) 45(4.4,2.25) 46(4.4,2.75) 47(4.4,3.25) 48(4.4,3.75)
  rect 0.25x0.7 smd: 17(-3.75,-4.4) 18(-3.25,-4.4) 19(-2.75,-4.4) 20(-2.25,-4.4) 21(-1.75,-4.4) 22(-1.25,-4.4) 23(-0.75,-4.4) 24(-0.25,-4.4) 25(0.25,-4.4) 26(0.75,-4.4) 27(1.25,-4.4) 28(1.75,-4.4) 29(2.25,-4.4) 30(2.75,-4.4) 31(3.25,-4.4) 32(3.75,-4.4) 49(3.75,4.4) 50(3.25,4.4) 51(2.75,4.4) 52(2.25,4.4) 53(1.75,4.4) 54(1.25,4.4) 55(0.75,4.4) 56(0.25,4.4) 57(-0.25,4.4) 58(-0.75,4.4) 59(-1.25,4.4) 60(-1.75,4.4) 61(-2.25,4.4) 62(-2.75,4.4) 63(-3.25,4.4) 64(-3.75,4.4)
  rect 7.15x7.15 smd paste-1.5: 65(0,0)
  body extent -4.52,-4.52 4.52,4.52, height 0.89
RES_0402 [mm] "0402 case"
  rect 0.5x0.75 smd: 1(-0.5,0) 2(0.5,0)
  body extent -0.5,-0.25 0.5,0.25, height 0.3
RES_0603 [mm] "0603 case"
  rect 0.6x1 smd: 1(-0.7,0) 2(0.7,0)
  body extent -0.8,-0.4 0.8,0.4, height 0.4
SC70-5 [mm] "5-Lead SC70-5 package"
  rect 0.85x0.4 smd: 1(-1.1,0.65) 2(-1.1,0) 3(-1.1,-0.65) 4(1.1,-0.65) 5(1.1,0.65)
  body extent -1.1,-1 1.1,1, height 0.95
SC70-6 [mm] "6-Lead SC70-6 package"
  rect 0.85x0.4 smd: 1(-1.1,0.65) 2(-1.1,0) 3(-1.1,-0.65) 4(1.1,-0.65) 5(1.1,0) 6(1.1,0.65)
  body extent -1.05,-1 1.05,1, height 0.92
SOD323 [mm] "2-Lead SOD323 package"
  rect 0.8x0.8 smd: 1(-1.125,0) 2(1.125,0)
  body extent -1.3,-0.67 1.3,0.68, height 1.1
SOT23-3 [mm] "3-Lead SOT23 package"
  rect 0.7x1 smd: 1(-0.95,-1.015) 2(0.95,-1.015) 3(0,1.015)
  body extent -1.5,-1.25 1.5,1.25, height 1.08
SOT23-5 [mm] "5-Lead SOT23 package"
  rect 1x0.65 smd: 1(-1.3,0.95) 2(-1.3,0) 3(-1.3,-0.95) 4(1.3,-0.95) 5(1.3,0.95)
  body extent -1.5,-1.5 1.5,1.5, height 1.3
SOT23-8 [mm] "8-Lead SOT 23 package"
  rect 1x0.4 smd: 1(-1.25,0.975) 2(-1.25,0.325) 3(-1.25,-0.325) 4(-1.25,-0.975) 5(1.25,-0.975) 6(1.25,-0.325) 7(1.25,0.325) 8(1.25,0.975)
  body extent -1.4,-1.47 1.4,1.47, height 1.2
SOT523 [mm] "SOT23, 3-Leads, Body 1,6x1,6mm (max), Pitch 0,50mm, IPC Medium Density"
  rect 0.95x0.45 smd: 1(-0.775,0.5) 2(-0.775,-0.5) 3(0.775,0)
  silkscreen extent -0.9,-0.8 0.45,1.4, body extent -0.45,-0.83 0.45,0.82, height 0.75
SOT-563 [mm] "6-Lead SOT-563 package"
  rect 0.5x0.3 smd: 1(-0.65,0.5) 2(-0.65,0) 3(-0.65,-0.5) 4(0.65,-0.5) 5(0.65,0) 6(0.65,0.5)
  body extent -0.81,-0.8 0.81,0.8, height 0.58
SSSMini2-F4-B [mm] "2-Leads SMT Diode"
  rect 0.4x0.4 smd: 1(-0.575,0) 2(0.575,0)
  body extent -0.5,-0.3 0.5,0.3, height 0.55
Tooling-Hole [mm] "Tooling Hole 4.01mm"
  round 4.013 hole 4.013 unplated mask+0: 4.01mm(0,0)
  Multi-Layer circle w0.203: c0,0 r2.26
TSSOP16 [mm] "16-Leads TSSOP package 0.65 mm pitch"
  rect 1.55x0.3 smd: 1(-2.8,2.275) 2(-2.8,1.625) 3(-2.8,0.975) 4(-2.8,0.325) 5(-2.8,-0.325) 6(-2.8,-0.975) 7(-2.8,-1.625) 8(-2.8,-2.275) 9(2.8,-2.275) 10(2.8,-1.625) 11(2.8,-0.975) 12(2.8,-0.325) 13(2.8,0.325) 14(2.8,0.975) 15(2.8,1.625) 16(2.8,2.275)
  body extent -3.2,-2.55 3.2,2.55, height 1.2
uPak6 [mm] "6-Lead MicroPak 1.00mm wide"
  rect 0.5x0.3 smd: 1(-0.375,0.5) 2(-0.375,0) 3(-0.375,-0.5) 4(0.375,-0.5) 5(0.375,0) 6(0.375,0.5)
  body extent -0.5,-0.75 0.5,0.75, height 0.55
uSOP-8L [mm] "8-Lead uSOP 3mm x 3 mm package"
  rect 1.4x0.4 smd: 1(-2.2,0.975) 2(-2.2,0.325) 3(-2.2,-0.325) 4(-2.2,-0.975) 5(2.2,-0.975) 6(2.2,-0.325) 7(2.2,0.325) 8(2.2,0.975)
  body extent -2.45,-1.5 2.45,1.5, height 1.15

## Part data
-1-R1 -1-R2 -1-R3 -1-R4 -1-R5 -1-R6 -1-R7 -1-R8 -1-R13: library part MCR01MZPJ000, "R 0 0402"
-1-R9 -1-R10 -1-R11 -1-R12 -23-R11 -23-R12 -41-R15: "DO NOT POPULATE"
-1-X1 -1-X2 -1-X11 -1-X12 -1-X21 -1-X22 -1-X31 -1-X32 -1-X41 -1-X42 -1-X51 -1-X52 -1-X61 -1-X62 -1-X71 -1-X72 -1-X81 -1-X82: "Hole for 10mil diameter feedthrough"
-2-X1 -2-X2 -2-X3 -2-X4 -2-X5 -2-X6 -2-X7 -2-X8 -2-X9 -2-X10 -2-X11 -2-X12 -2-X13 -2-X14 -2-X15 -2-X16 -2-X17 -2-X18 -2-X19 -2-X20 -2-X21 -2-X22 -2-X23 -2-X24 -2-X25: library part "Header 1x1"
-11-C1: library part GRM1555C1H680JZ01D
-11-C2 -11-C3 -22-C1 -23-C3 -61-C11 -61-C12 -61-C13 -61-C14 -61-C21 -61-C22 -61-C23 -61-C24: library part UMK107BJ105KA-T
-11-C4 -11-C6 -61-C5 -61-C8 -61-C9: library part ECJ-0EB0J475M
-11-C7 -11-C8 -11-C9 -11-C10 -11-C11 -23-C2 -41-C1 -41-C4 -41-C5 -41-C6 -41-C7 -42-C1 -42-C2 -43-C1 -61-C1 -61-C2 -61-C3 -61-C4 -61-C6: library part GRM155R71C104KA88D
-11-C12: library part C0402C103M5RACTU
-11-K1 -22-K1: library part LTC3642EDD
-11-K2: library part LT1964ES5-BYP
-11-K3: library part MAX9142EKA
-11-K4: library part NC7SZ86L6X
-11-K5: library part IL712-1E
-11-K6: library part DS1100LU-500
-11-K7: library part NC7SZ175L6X
-11-Q1 -23-Q1: library part DSA9001, "Q -50V -100mA SOT523 150MHz"
-11-R1 -11-R8 -11-R11 -11-R15: library part MCR01MZPF1001, "R 1k 0402"
-11-R2 -11-R3: library part MCR01MZPF5101, "R 5.1k 0402 1% 63mW"
-11-R4 -11-R5 -11-R6 -21-R2 -21-R3 -21-R4 -21-R5: library part DB27316, "D_30_100m_SSSMini2-F4 Trr=0.8ns"
-11-R7 -11-R9 -11-R12 -11-R14 -11-R16 -21-R7 -43-R3: library part MCR01MZPF4992, "R 49.9k 0402 1% 63mW"
-11-R10: library part ERJ-2RKF8452X, "R 84.5k 0402 1% 100mW"
-11-R13: library part CB2518T471K, "L 470uH 35mA 10%"
-21-C1 -21-C2: library part 08051C104KAZ2A
-21-C3 -21-C4 -23-C1: library part C2012X5R1A476M125AC
-21-K1: library part ZXCT1010E5TA
-21-R1: library part CG0603MLC-12E
-21-R6: library part RP1005S-R10-F, "R 0.1 0402 1% 167mW"
-22-C2: library part ECJ-1VB0J106M
-22-R1 -22-R2 -23-R1 -23-R2 -41-R11 -61-R11: library part MCR03ERTJ000, "R 0 0603"
-22-R3: library part LPS4414-104MLC, "L 100uH 270mA 20%"
-22-R4: library part ERJ-2RKF4703X, "R 470k 0402 1% 63mW"
-23-C4: library part GRM1555C1H100JZ01
-23-C5: library part GRM219R71H334KA88D
-23-K1: library part LT3464ETS8
-23-K2: library part LTC2630-LM12, "DAC 2V5 internal reference"
-23-K3: library part NC7SZ02L6X
-23-Q2: library part Si1026X-T1-E3, "M 60 500m SOT563 Dual 1R4"
-23-R3: library part ELJ-PC330KF, "L 33uH 120mA 2520 10%"
-23-R4 -41-R12: library part MCR01MZPF1502, "R 15K 0402 1% 63mW"
-23-R5: library part MCR01MZPF10R0, "R 10 0402 1% 63mW"
-23-R6: library part MCR01MZPF2002, "R 20k 0402 1% 63mW"
-23-R7 -43-R2: library part MCR01MZPF1503, "R 150k 0402 1% 63mW"
-23-R8: library part CRCW0402953KFKED, "R 953k 0402 1% 63mW"
-23-R9: library part MCR01MZPF3602, "R 36k 0402 1% 63mW"
-23-R10: library part BAT46JFILM
-41-C2 -41-C3: library part ECJ-0EC1H080D
-41-K1: library part TPS3805H33
-41-K2: library part AT90CAN128-16MI
-41-R1 -41-R2 -41-R3 -41-R4 -41-R9: library part MCR01MZPF1002, "R 10k 0402 1% 63mW"
-41-R10: library part SML-LX0402SIC-TR, "LED Red 0402 20mA 2V 140mcd"
-41-R13 -41-R14 -41-R16 -41-R17 -41-R18 -61-R1 -61-R2 -61-R3 -61-R4 -61-R5 -61-R6 -61-R7 -61-R8 -61-R9: library part MCR01MZPF1003, "R 100k 0402 1% 63mW"
-41-T1: library part NX5032GA
-42-B1: library part TMP112AIDRLT
-43-B2: library part KXTE9-2050, "ACCelerometer 3V3 30uA I2C LGA10"
-43-C2: library part GRM1555C1H102JA01D
-43-R1: library part CRCW04021K60FKED, "R 1.6k 0402 1% 63mW"
-61-K1: library part SN74LVC2G32YEA
-61-K2: library part MAX313LCUE
-61-K3 -61-K4: library part SN74LVC2G02YEA
-61-K5: library part NC7SZ126L6X
-61-K6: library part MAX5355CUA+
-61-K7: library part REF3312AIDCK
-61-Q1 -61-Q2 -61-Q3 -61-Q4 -61-Q5: library part DMN5L06K-7, "M 50 300m SOT23 1.0Vgs(th)"
-61-R10: library part RG1005P-560-B-T5, "R 56 0402 0.1% 63mW"

## Free pads (board coordinates)
  round 1.524 hole 0.914: 36mils(66.27,-32.651)

## Via types
v1: diameter 0.45, hole 0.15, Top Layer to L2 Flex GND, tented both sides, 88 vias
v2: diameter 0.45, hole 0.2, Top Layer to Bottom Layer, tented both sides, 74 vias
v3: diameter 0.4, hole 0.15, Top Layer to L2 Flex GND, tented both sides, 61 vias
v4: diameter 0.45, hole 0.2, L2 Flex GND to L3 Flex Signals, 41 vias
v5: diameter 0.45, hole 0.2, L2 Flex GND to L3 Flex Signals, tented both sides, 23 vias
v6: diameter 0.4, hole 0.15, Top Layer to L2 Flex GND, tented top, 9 vias
v7: diameter 0.45, hole 0.15, Top Layer to L2 Flex GND, 8 vias
v8: diameter 0.45, hole 0.15, Top Layer to L2 Flex GND, tented top, 3 vias

## Nets (pads, with @x,y where several pads share a name; then routed paths per layer and width w, separated by ;. In a path a pad name is that pad's centre, name@x,y a point inside that pad or via, vN(x,y) a via of type N, cw(c..) or ccw(c..) an arc to the next point about the centre after c; other vN are vias at no path point)
3V3: -2-X4.1 -11-C10.1 -11-C11.1 -11-K5.1 -11-K6.8 -11-K7.5 -11-K7.6 -11-R16.1 -22-R2.2 -23-C2.1 -23-K2.4 -23-K3.6 -41-C1.1 -41-K1.4 -41-R3.1 -41-R4.1 -41-R11.1 -41-R12.1 -41-R14.1 -41-R16.1 -41-R18.1 -42-B1.5 -42-C1.1 -42-C2.1 -43-B2.1 -43-B2.5 -61-C1.1 -61-C2.1 -61-C3.1 -61-C4.1 -61-C5.1 -61-C6.1 -61-C8.1 -61-K1.8 -61-K3.8 -61-K4.8 -61-K5.2 -61-K5.6 -61-K6.8 -61-K7.1 -61-R1.1 -61-R2.1 -61-R3.1 -61-R5.1 -61-R6.1 -61-R7.1 -61-R8.1 -61-R9.1 | length 115.7
  Top Layer w0.2: -23-K3.6@6.25,-7.775 6.25,-8.45 6.525,-8.725 6.525,-11.175 6.85,-11.5 7.4,-11.5 7.65,-11.75 9.6,-11.75 9.75,-11.9 -23-K2.4@9.75,-12.5 ; v2(20.1,-13.625) -11-K5.1@20.1,-12.575 ; v2(22.8,-12.175) 22.8,-10.95 23.273,-10.477 24.173,-10.477 24.2,-10.45 ; -11-K7.5@24.2,-9.975 24.2,-10.45 ; -11-K7.6@24.7,-9.975 24.7,-10.375 24.6,-10.475 24.2,-10.475 24.2,-10.45 ; -41-R16.1@25.05,-30.825 v2(25.775,-30.825) ; -41-R4.1@36.5,-20 36.55,-20 37.175,-20.625 ; -61-C4.1@36.8,-23.475 v2(36.8,-22.9) ; -61-K5.2@36.8,-21.5 36.8,-21.2 37.175,-20.825 37.175,-20.625 ; -61-C4.1@37.3,-23.625 -61-K5.6@37.3,-22.25 ; -43-B2.5@37.575,-18.1 -42-C2.1@37.575,-19 v2(38.275,-19) 38.275,-19.775 38.5,-20 -41-R3.1@39.075,-20 39.075,-20.625 ; -61-K1.8@38.15,-23.75 38.154,-23.754 38.154,-26.054 v2(38.175,-26.075) ; -61-R3.1@39.075,-21.225 39.075,-20.625 ; -61-R1.1@39.65,-25.106 -61-R2.1@39.65,-24.3 ; -61-K4.8@42.825,-15.95 43.35,-15.95 43.725,-16.325 -61-C3.1@43.725,-17.05 ; 37.175,-20.625 39.075,-20.625
  Top Layer w0.25: -23-K2.4@9.75,-12.5 9.75,-13.175 9.948,-13.373 10.173,-13.373 v2(10.2,-13.4) 10.475,-13.675 -23-C2.1@10.475,-16.7 ; -22-R2.2@10.15,-18.1 10.35,-18.1 10.4,-18.05 -23-C2.1@10.4,-16.7 ; -11-C10.1@19.925,-14.275 20.075,-14.275 20.1,-14.25 v2(20.1,-13.625) ; -11-R16.1@21.8,-13.925 22.4,-13.925 22.8,-13.525 v2(22.8,-12.175) -41-R14.1@23.7,-12.175 23.725,-12.2 -41-C1.1@23.725,-13.15 -41-K1.4@24.825,-13.15 ; -11-K6.8@27.975,-10.725 27.975,-11.2 -11-K6.8@28,-11.225 ; -11-K6.8@28,-11.175 -11-K6.8@28,-11.225 ; -11-C11.1@29.075,-11.225 -11-C11.1@28.95,-11.225 ; -41-R18.1@29.15,-16.3 28.95,-16.1 -11-C11.1@28.95,-11.225 ; -43-B2.1@36.375,-15.925 36.375,-14.125 ; v2(36.55,-12) 36.375,-12.175 -42-C1.1@36.375,-12.825 36.375,-14.125 ; -42-B1.5@37.425,-14.125 36.375,-14.125 ; v2(38.175,-26.075) 38.2,-26.1 39.1,-26.1 -61-C1.1@39.175,-26.175 39.65,-25.7 39.65,-25.125 -61-R1.1@39.675,-25.1 ; v2(38.9,-10.2) -61-C8.1@38.9,-9.625 39.99,-9.625 -61-K7.1@40,-9.615 ; -61-K3.8@41.125,-17.15 41.65,-17.15 41.75,-17.05 -61-C2.1@42.7,-17.05 ; -61-C2.1@42.8,-17.05 -61-C3.1@43.725,-17.05 45.4,-17.05 45.725,-16.725 45.725,-16.15 -61-R7.1@45.725,-15.125 45.725,-14.1 v2(45.525,-14.1) -61-R9.1@44.925,-14.1 ; -61-C6.1@43.225,-6.725 43.225,-6.775 -61-C6.1@43.275,-6.775 ; -61-C5.1@43.225,-5.675 43.275,-5.675 -61-C6.1@43.275,-6.775 ; -61-K6.8@43.275,-8.15 -61-C6.1@43.275,-6.775 ; v2(43.875,-6.775) -61-C6.1@43.275,-6.775 ; -11-K6.8@28,-11.225 -11-C11.1@28.95,-11.225
  Top Layer w0.3: v2(21.425,-31.95) -41-R11.1@21.425,-31.275
  L2 Flex GND w0.15: v2(38.9,-10.2) 38.9,-10.625 39.925,-11.65 v1(39.925,-15.15)
  L2 Flex GND w0.2: v2(25.775,-30.825) 25.839,-30.825 26.939,-31.925 27.225,-31.925 v1(28.225,-32.925)
  L3 Flex Signals w0.45: v2(10.2,-13.4) 19.875,-13.4 v2(20.1,-13.625) ; v2(28.95,-12) v2(36.55,-12) ; v2(43.875,-6.775) 44.675,-6.775 45.151,-7.251 -2-X4.1@63.73,-7.251
3V3AIN: -41-K2.58 -41-R16.2 -41-R17.1 | length 2.4
  Top Layer w0.2: -41-R17.1@23.6,-29.825 -41-R16.2@25.05,-29.825 ; -41-R16.2@25.3,-29.825 -41-K2.58@25.3,-28.9